# Allegro board GAMEBOARD5a.brd
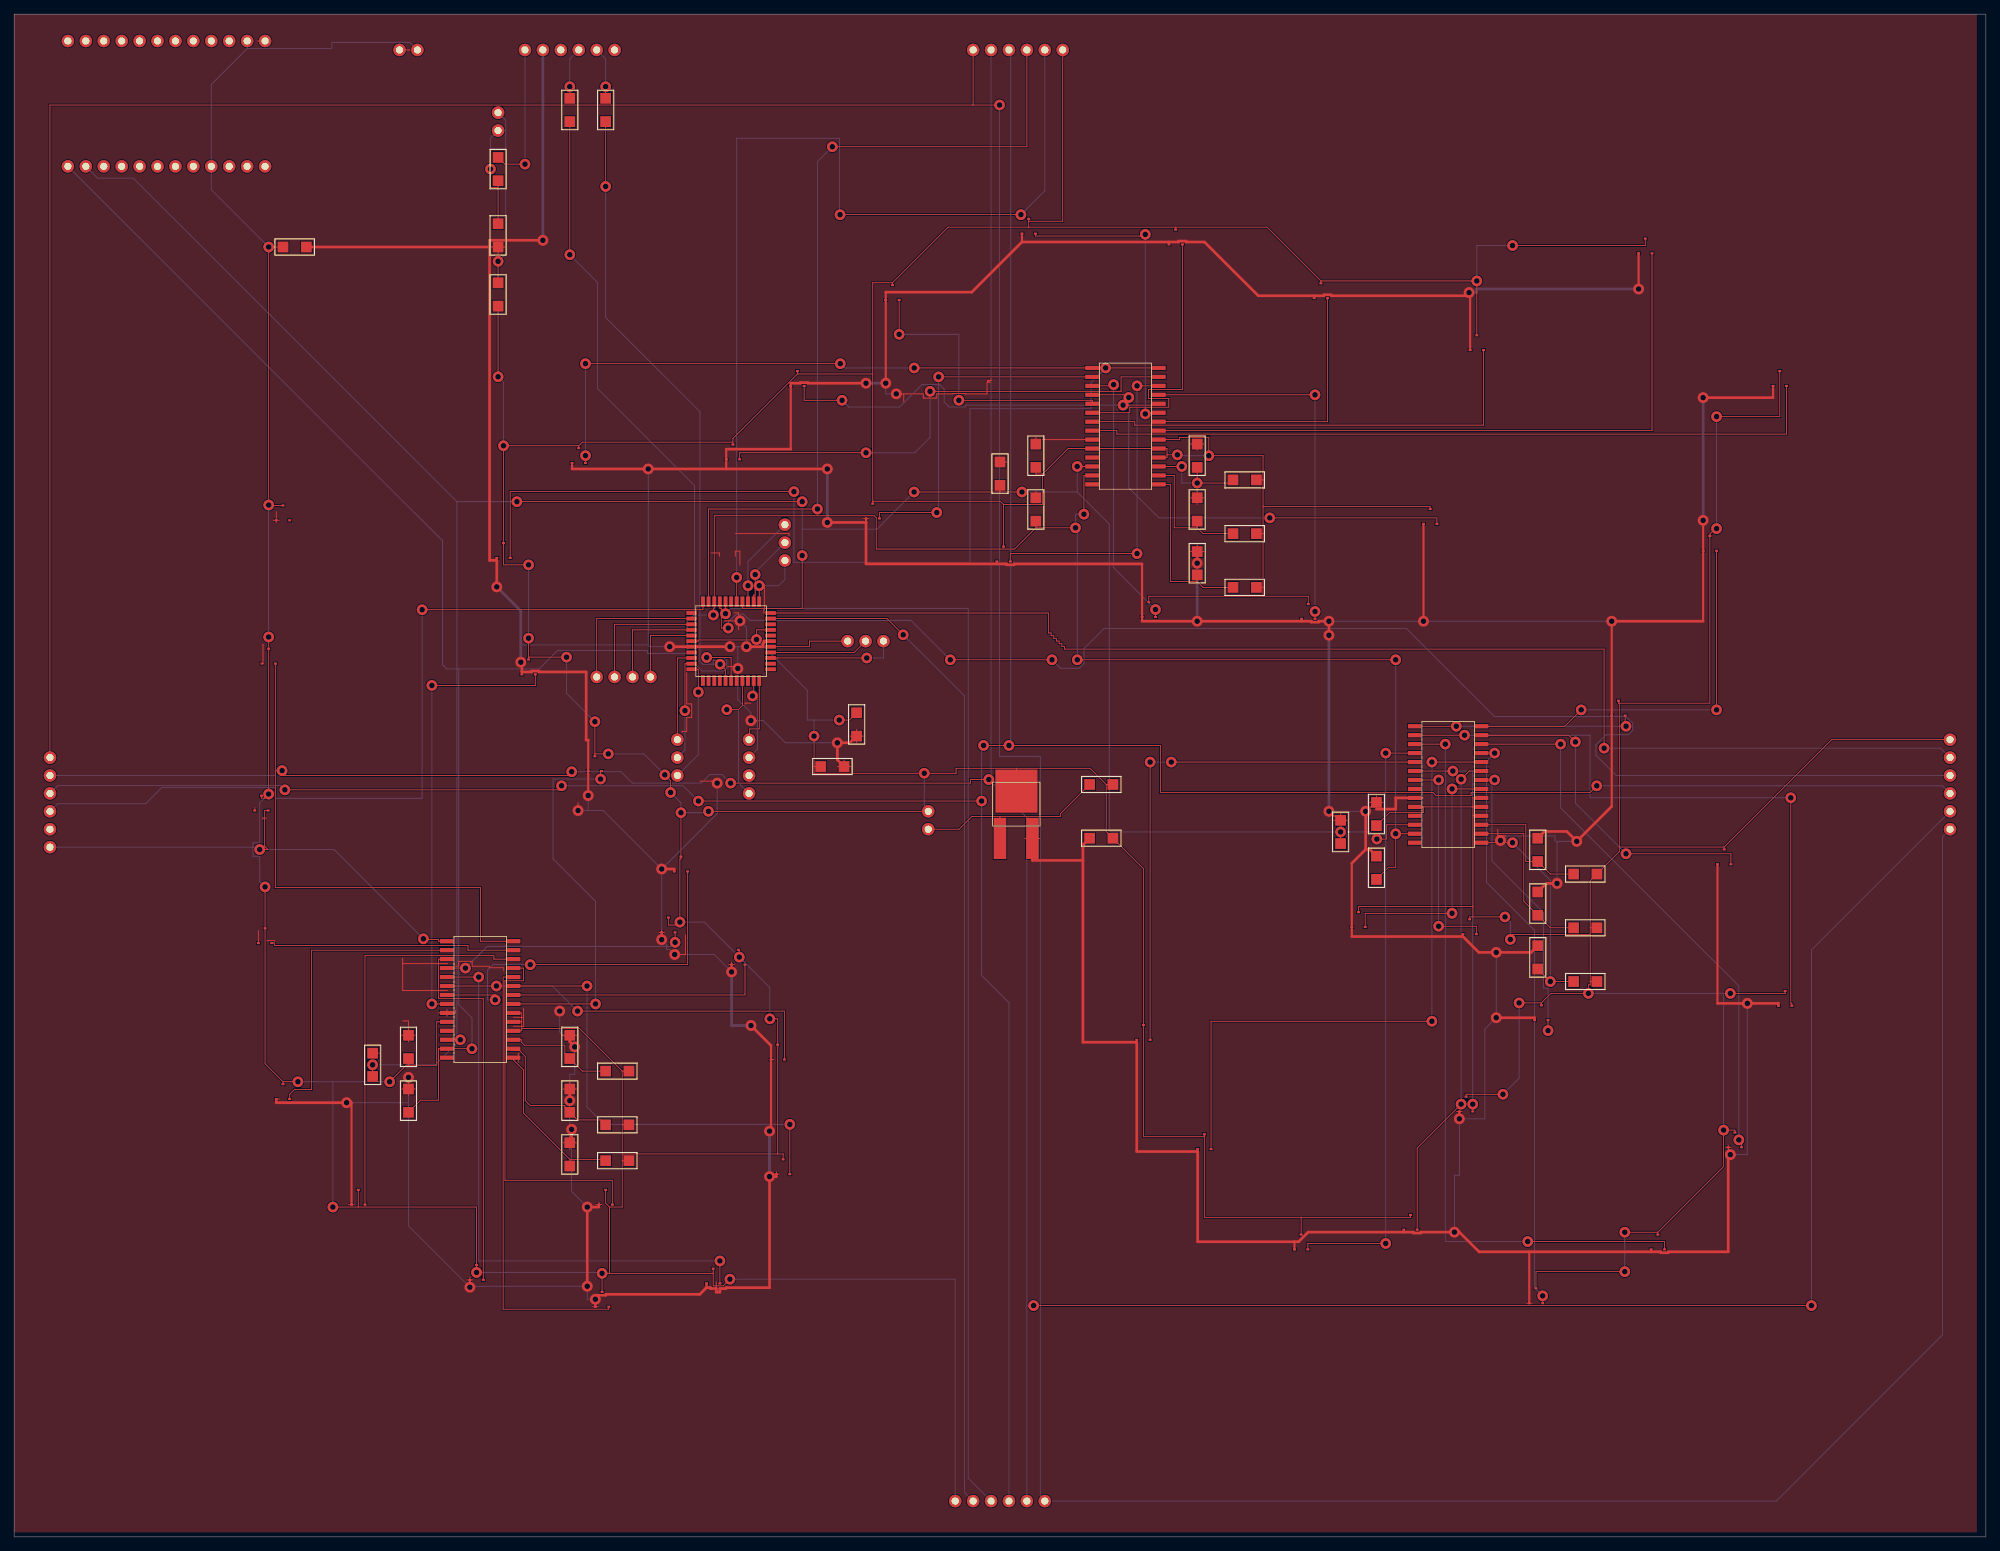
[diagram p0: board, top side]
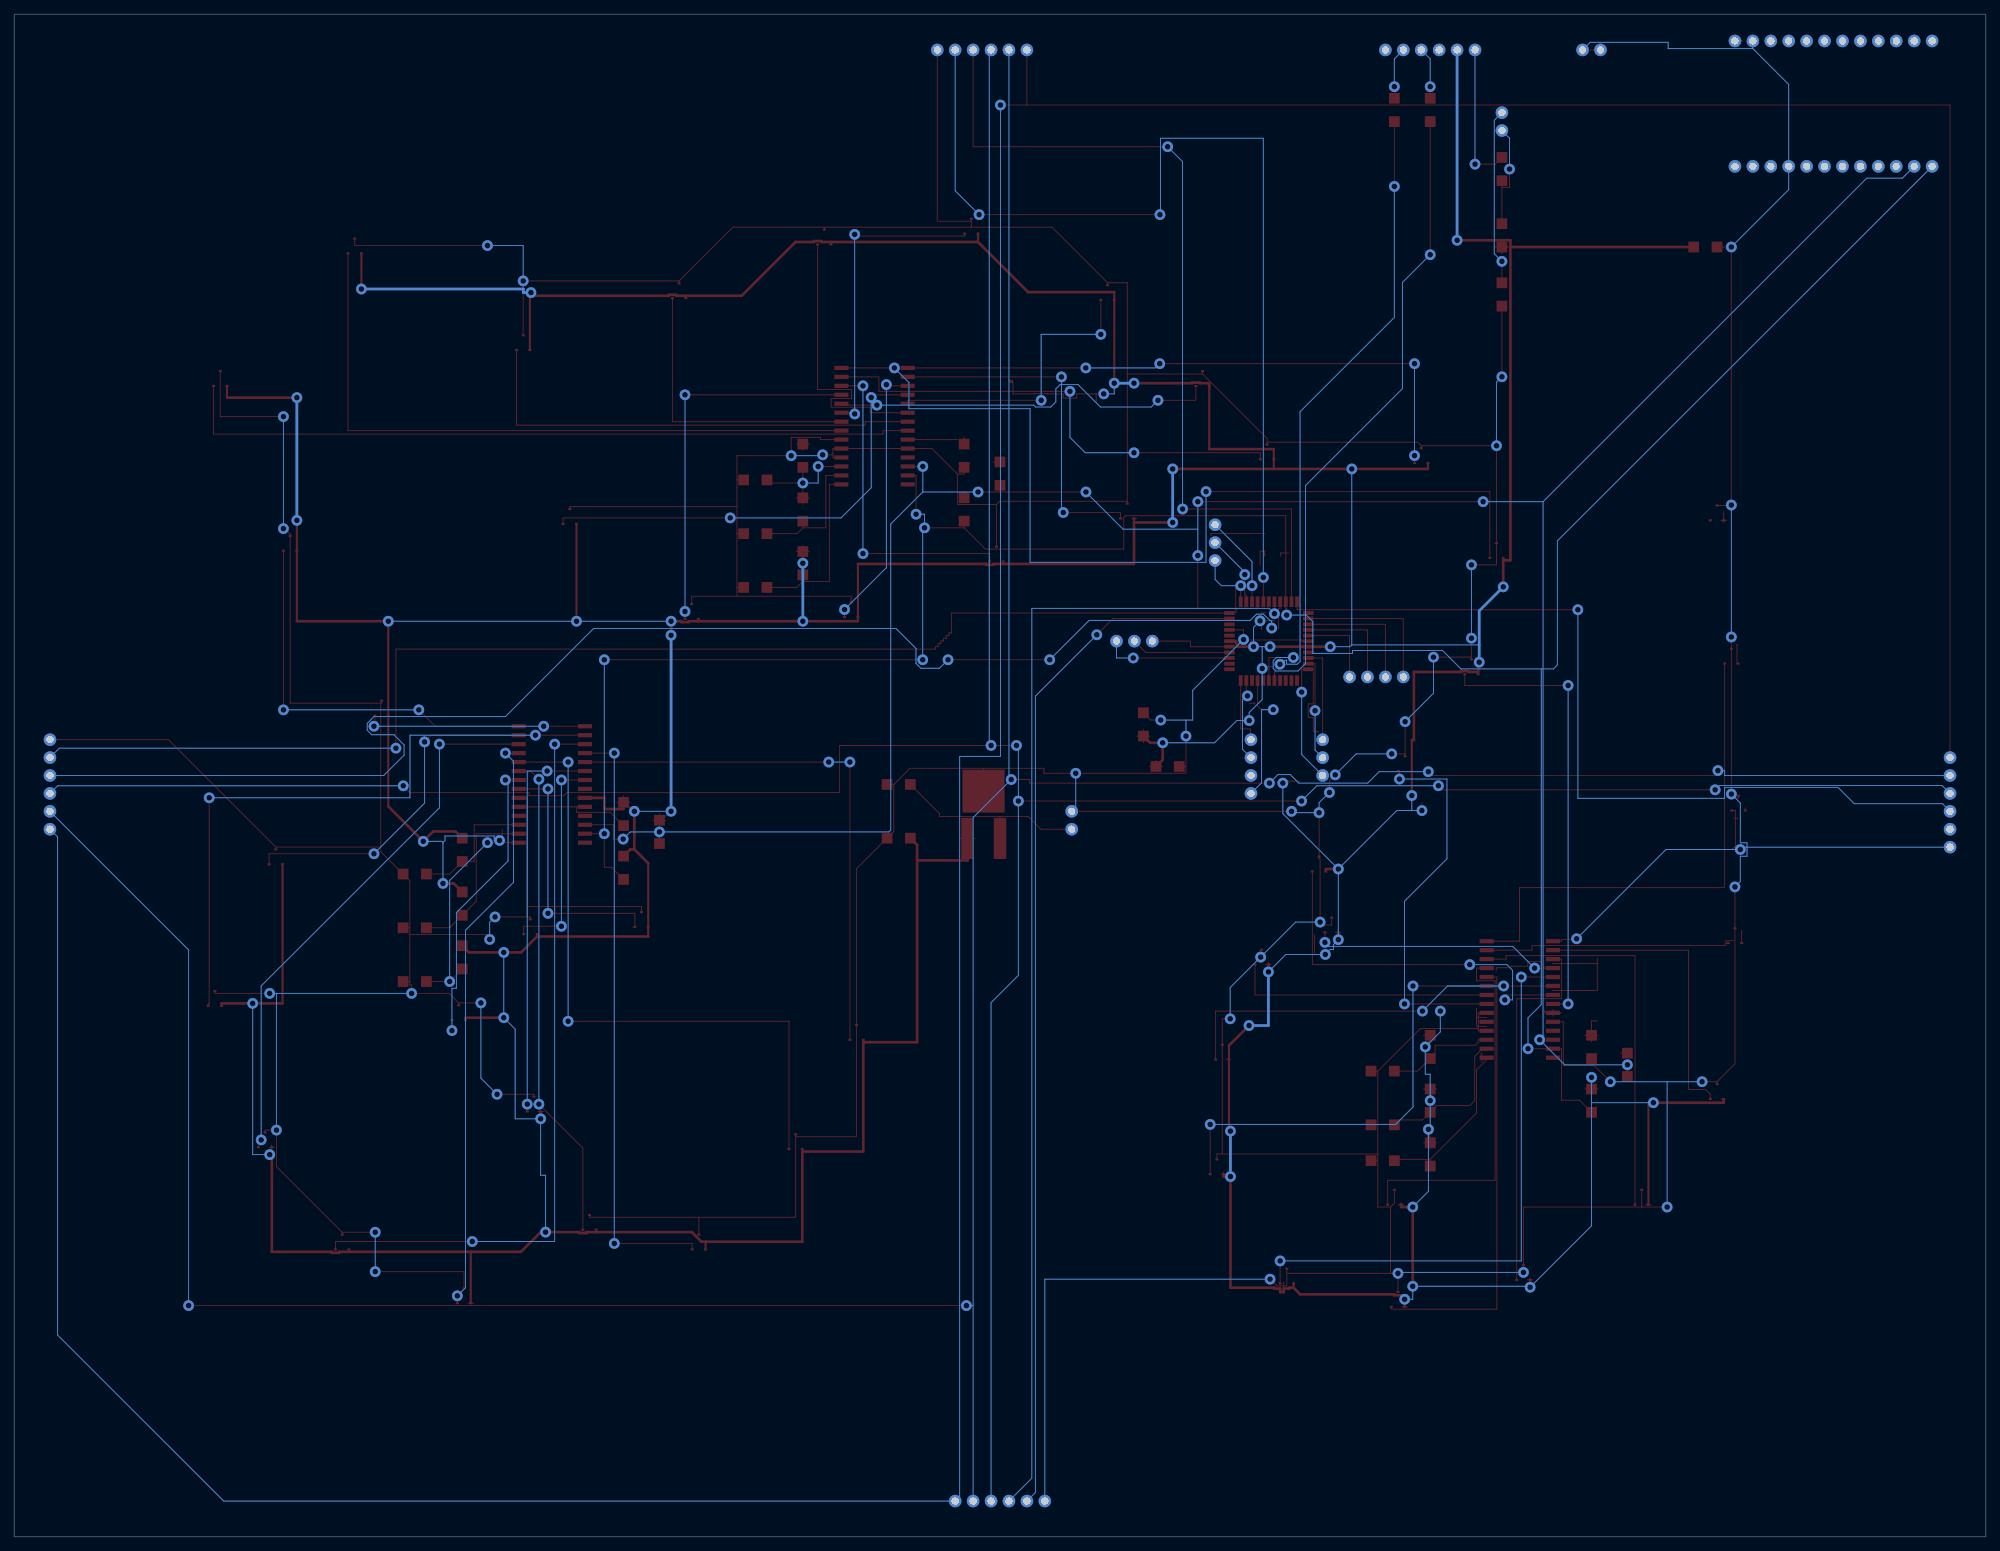
[diagram p1: board, bottom side, seen from below]

Outline 279.4 x 215.9 mm; copper layers: TOP, BOTTOM. Coordinates in mm from the lower left corner of the outline.
Outline path: 0,215.9 0,0 279.4,0 279.4,215.9 0,215.9

## Placement (name value [footprint] x y rotation side)
BT1  7.2V  [HEADER1X2]  129.54 101.6 180 top
C1  0.1 uF, 15V  [SMC1206]  114.3 109.22 0 top
C2  0.1 uF, 15V  [SMC1206]  119.38 116.84 270 top
C3  0.1uF  [SMC1206]  38.1 182.88 0 top
C4  0.1 uF, 15V  [SMC1206]  193.04 104.14 270 top
C5  0.1 uF, 15V  [SMC1206]  144.78 154.94 270 top
C6  0.1 uF, 15V  [SMC1206]  55.88 71.12 270 top
C7  0.1uF, 15V  [SMC1206]  152.4 106.68 0 top
C8  0.1uF, 15V  [SMC1206]  152.4 99.06 0 top
C9  0.1 uF, 15V  [SMC1206]  68.58 177.8 270 top
J1  CON3  [HEADER1X3]  109.22 142.24 0 top
J2  CON4  [HEADER1X4]  88.9 121.92 270 top
J3  CON3  [HEADER1X3]  119.38 127 90 top
J4  CON3  [HEADER1X3]  93.98 109.22 180 top
J5  CON4  [HEADER1X4]  104.14 111.76 0 top
J6  CON6  [HEADER1X6]  73.66 210.82 90 top
J7  JUMPER  [HEADER1X2]  68.58 200.66 0 top
J8  CON2  [HEADER1X2]  55.88 210.82 90 top
J9  Board Connector  [HEADER1X6]  5.08 109.22 0 top
J10  Board Connector  [HEADER1X6]  137.16 210.82 90 top
J11  Board Connector  [HEADER1X6]  274.32 101.6 180 top
J12  Board Connector  [HEADER1X6]  144.78 5.08 270 top
R1  22 ohm, 1/4W  [SMR1206]  83.82 200.66 90 top
R2  22 ohm, 1/4W  [SMR1206]  78.74 200.66 90 top
R3  10 kohm, 1/4W  [SMR1206]  68.58 182.88 90 top
R4  1 kohm, 1/4W  [SMR1206]  187.96 101.6 270 top
R5  1 kohm, 1/4W  [SMR1206]  139.7 152.4 270 top
R6  1 kohm, 1/4W  [SMR1206]  50.8 68.58 270 top
R7  220 ohm, 1/4W  [SMR1206]  68.58 195.58 270 top
R8  1 kohm, 1/4W  [SMR1206]  193.04 96.52 270 top
R9  1 kohm, 1/4W  [SMR1206]  144.78 147.32 270 top
R10  1 kohm, 1/4W  [SMR1206]  55.88 63.5 270 top
R11  1 kohm, 1/4W  [SMR1206]  215.9 99.06 270 top
R12  1 kohm, 1/4W  [SMR1206]  167.64 154.94 270 top
R13  1 kohm, 1/4W  [SMR1206]  78.74 71.12 270 top
R14  0 ohm, 1/4W  [SMR1206]  220.98 93.98 0 top
R15  0 ohm, 1/4W  [SMR1206]  172.72 149.86 0 top
R16  0 ohm, 1/4W  [SMR1206]  83.82 66.04 0 top
R17  1 kohm, 1/4W  [SMR1206]  215.9 91.44 270 top
R18  1 kohm, 1/4W  [SMR1206]  167.64 147.32 270 top
R19  1 kohm, 1/4W  [SMR1206]  78.74 63.5 270 top
R20  0 ohm, 1/4W  [SMR1206]  220.98 86.36 0 top
R21  0 ohm, 1/4W  [SMR1206]  172.72 142.24 0 top
R22  100 kohm, 1/4W  [SMR1206]  83.82 58.42 0 top
R23  1 kohm, 1/4W  [SMR1206]  215.9 83.82 270 top
R24  1 kohm, 1/4W  [SMR1206]  167.64 139.7 270 top
R25  1 kohm, 1/4W  [SMR1206]  78.74 55.88 270 top
R26  0 ohm, 1/4W  [SMR1206]  220.98 78.74 0 top
R27  100 kohm, 1/4W  [SMR1206]  172.72 134.62 0 top
R28  0 ohm, 1/4W  [SMR1206]  83.82 53.34 0 top
U1  -  [TCS40DPR]  38.1 145.03 0 top
U2  -  [TCS40DPR]  190.5 87.38 0 top
U3  -  [TCS40DPR]  250.19 164.08 0 top
U4  -  [TCS40DPR]  231.14 182.88 0 top
U5  -  [TCS40DPR]  72.9 123.19 0 top
U6  -  [TCS40DPR]  82.3 109.47 0 top
U7  -  [TCS40DPR]  206.25 86.36 0 top
U8  -  [TCS40DPR]  216.41 74.17 0 top
U9  -  [TCS40DPR]  207.26 169.16 0 top
U10  -  [TCS40DPR]  185.17 176.53 0 top
U11  -  [TCS40DPR]  94.49 95.25 0 top
U12  -  [TCS40DPR]  102.62 82.04 0 top
U13  PIC18F47K40-I/PT  [TQFPPIC18F47K40]  101.6 127 0 top
U14  -  [TCS40DPR]  205.74 61.21 0 top
U15  -  [TCS40DPR]  197.87 44.45 0 top
U16  -  [TCS40DPR]  164.59 184.15 0 top
U17  -  [TCS40DPR]  143.76 185.67 0 top
U18  -  [TCS40DPR]  108.2 68.58 0 top
U19  -  [TCS40DPR]  108.97 52.32 0 top
U20  -  [TCS40DPR]  160.02 71.37 0 top
U21  -  [TCS40DPR]  168.66 55.88 0 top
U22  -  [TCS40DPR]  124.46 176.28 0 top
U23  -  [TCS40DPR]  111 164.08 0 top
U24  -  [TCS40DPR]  99.06 36.83 0 top
U25  -  [TCS40DPR]  83.31 33.53 0 top
U26  -  [TCS40DPR]  182.37 41.66 0 top
U27  -  [TCS40DPR]  215.65 34.04 0 top
U28  -  [TCS40DPR]  200.66 144.53 0 top
U29  -  [TCS40DPR]  183.39 131.06 0 top
U30  -  [TCS40DPR]  92.71 86.61 0 top
U31  -  [TCS40DPR]  83.82 48.01 0 top
U32  -  [TCS40DPR]  232.92 41.66 0 top
U33  -  [TCS40DPR]  243.84 56.13 0 top
U34  -  [TCS40DPR]  160.78 131.32 0 top
U35  -  [TCS40DPR]  140.21 139.19 0 top
U36  -  [TCS40DPR]  65.53 37.34 0 top
U37  -  [TCS40DPR]  48.77 48.01 0 top
U38  -  [TCS40DPR]  250.95 76.2 0 top
U39  -  [TCS40DPR]  242.32 96.27 0 top
U40  -  [TCS40DPR]  121.67 145.29 0 top
U41  -  [TCS40DPR]  101.85 153.67 0 top
U42  -  [TCS40DPR]  38.1 62.99 0 top
U43  -  [TCS40DPR]  35.56 85.09 0 top
U45  -  [TCS40DPR]  227.33 117.35 0 top
U46  -  [TCS40DPR]  240.28 140.72 0 top
U47  -  [TCS40DPR]  80.01 153.16 0 top
U48  -  [TCS40DPR]  69.34 139.7 0 top
U49  -  [TCS40DPR]  35.05 103.89 0 top
U50  -  [TCS40DPR]  36.07 124.71 0 top
U51  MCP23017T  [MCP23017]  203.2 106.68 0 top
U52  MCP23017T  [MCP23017]  157.48 157.48 0 top
U53  MCP23017T  [MCP23017]  66.04 76.2 0 top
U54  MIC29310-5.0WU  [TO252AA]  139.7 99.06 0 top
U57  Photon  [PHOTONFOOTPRINT]  15.24 203.2 90 top

## Library data of the parts
BT1 = BATTERY
C1-C9 = CAP NP
J1 J3 J4 = CON3
J2 J5 = CON4
J6 = CON6
J7 = JUMPER
J8 = CON2
J9-J12 = Board Connector
R1-R28 = R
U1-U12 U14-U43 U45-U50 = TCS40DPR
U13 = PIC18F47K40-I/PT_0
U51-U53 = MCP23017T
U54 = MIC29310-5.0WU
U57 = Photon

## Footprints (pads in the part's own frame, mm; a bottom-side part is the same pattern mirrored in y, then rotated)
HEADER1X2
  round 1.778 hole 1.016: 1(0,1.27) 2(0,-1.27)
HEADER1X3
  round 1.778 hole 1.016: 1(0,1.27) 2(0,-1.27) 3(0,-3.81)
HEADER1X4
  round 1.778 hole 1.016: 1(0,1.27) 2(0,-1.27) 3(0,-3.81) 4(0,-6.35)
HEADER1X6
  round 1.778 hole 1.016: 1(0,1.27) 2(0,-1.27) 3(0,-3.81) 4(0,-6.35) 5(0,-8.89) 6(0,-11.43)
MCP23017
  rect 2x0.6 smd: 1(-4.699,8.255) 2(-4.699,6.985) 3(-4.699,5.715) 4(-4.699,4.445) 5(-4.699,3.175) 6(-4.699,1.905) 7(-4.699,0.635) 8(-4.699,-0.635) 9(-4.699,-1.905) 10(-4.699,-3.175) 11(-4.699,-4.445) 12(-4.699,-5.715) 13(-4.699,-6.985) 14(-4.699,-8.255) 15(4.699,-8.255) 16(4.699,-6.985) 17(4.699,-5.715) 18(4.699,-4.445) 19(4.699,-3.175) 20(4.699,-1.905) 21(4.699,-0.635) 22(4.699,0.635) 23(4.699,1.905) 24(4.699,3.175) 25(4.699,4.445) 26(4.699,5.715) 27(4.699,6.985) 28(4.699,8.255)
PHOTONFOOTPRINT
  round 1.778 hole 1.016: 1(8.89,7.62) 2(8.89,5.08) 3(8.89,2.54) 4(8.89,0) 5(8.89,-2.54) 6(8.89,-5.08) 7(8.89,-7.62) 8(8.89,-10.16) 9(8.89,-12.7) 10(8.89,-15.24) 11(8.89,-17.78) 12(8.89,-20.32) 13(-8.89,7.62) 14(-8.89,5.08) 15(-8.89,2.54) 16(-8.89,0) 17(-8.89,-2.54) 18(-8.89,-5.08) 19(-8.89,-7.62) 20(-8.89,-10.16) 21(-8.89,-12.7) 22(-8.89,-15.24) 23(-8.89,-17.78) 24(-8.89,-20.32)
SMC1206
  rect 1.524x1.524 smd: 1(0,0) 2(3.302,0)
SMR1206
  rect 1.524x1.524 smd: 1(0,0) 2(3.302,0)
TCS40DPR
  rect 0.42x0.3 smd: 1(-0.95,-0.9) 2(0.95,-0.9) 3(0,1.2)
TO252AA
  rect 1.778x5.842 smd: 1(-0.004,-0.034) 3(4.596,-0.034)
  rect 5.969x6.096 smd: 2(2.332,6.673)
TQFPPIC18F47K40
  rect 1.5x0.55 smd: 1(-5.588,3.988) 2(-5.588,3.2) 3(-5.588,2.388) 4(-5.588,1.6) 5(-5.588,0.787) 6(-5.588,0) 7(-5.588,-0.787) 8(-5.588,-1.6) 9(-5.588,-2.388) 10(-5.588,-3.2) 11(-5.588,-3.988) 23(5.588,-3.988) 24(5.588,-3.2) 25(5.588,-2.388) 26(5.588,-1.6) 27(5.588,-0.787) 28(5.588,0) 29(5.588,0.787) 30(5.588,1.6) 31(5.588,2.388) 32(5.588,3.2) 33(5.588,3.988)
  rect 0.55x1.5 smd: 12(-3.988,-5.588) 13(-3.2,-5.588) 14(-2.388,-5.588) 15(-1.6,-5.588) 16(-0.787,-5.588) 17(0,-5.588) 18(0.787,-5.588) 19(1.6,-5.588) 20(2.388,-5.588) 21(3.2,-5.588) 22(3.988,-5.588) 34(3.988,5.588) 35(3.2,5.588) 36(2.388,5.588) 37(1.6,5.588) 38(0.787,5.588) 39(0,5.588) 40(-0.787,5.588) 41(-1.6,5.588) 42(-2.388,5.588) 43(-3.2,5.588) 44(-3.988,5.588)

## Nets
GND: BT1.2(-) C1.1 C2.1 C3.1 C4.2 C5.2 C6.2 C7.2 C8.2 C9.2 J6.3 J8.2 J9.6(GND) J10.6(GND) J11.6(GND) J12.6(GND) R14.2 R15.2 R16.2 R20.2 R21.2 R22.2 R26.2 R27.2 R28.2 U1.3(GND) U2.3(GND) U3.3(GND) U4.3(GND) U5.3(GND) U6.3(GND) U7.3(GND) U8.3(GND) U9.3(GND) U10.3(GND) U11.3(GND) U12.3(GND) U13.6(VSS_0) U13.30(VSS_1) U14.3(GND) U15.3(GND) U16.3(GND) U17.3(GND) U18.3(GND) U19.3(GND) U20.3(GND) U21.3(GND) U22.3(GND) U23.3(GND) U24.3(GND) U25.3(GND) U26.3(GND) U27.3(GND) U28.3(GND) U29.3(GND) U30.3(GND) U31.3(GND) U32.3(GND) U33.3(GND) U34.3(GND) U35.3(GND) U36.3(GND) U37.3(GND) U38.3(GND) U39.3(GND) U40.3(GND) U41.3(GND) U42.3(GND) U43.3(GND) U45.3(GND) U46.3(GND) U47.3(GND) U48.3(GND) U49.3(GND) U50.3(GND) U51.10(VSS) U51.18(RESET) U51.19(INTB) U51.20(INTA) U52.10(VSS) U52.18(RESET) U52.19(INTB) U52.20(INTA) U53.10(VSS) U53.18(RESET) U53.19(INTB) U53.20(INTA) U54.2(GND) U57.11 U57.21
5 V: C1.2 C2.2 C3.2 C4.1 C5.1 C6.1 C8.1 J6.2 J8.1 R3.1 R4.1 R5.1 R6.1 R8.1 R9.1 R10.1 R11.1 R12.1 R13.1 R17.1 R18.1 R19.1 R23.1 R24.1 R25.1 U1.1(VCC) U2.1(VCC) U3.1(VCC) U4.1(VCC) U5.1(VCC) U6.1(VCC) U7.1(VCC) U8.1(VCC) U9.1(VCC) U10.1(VCC) U11.1(VCC) U12.1(VCC) U13.7(VDD_0) U13.28(VDD_1) U14.1(VCC) U15.1(VCC) U16.1(VCC) U17.1(VCC) U18.1(VCC) U19.1(VCC) U20.1(VCC) U21.1(VCC) U22.1(VCC) U23.1(VCC) U24.1(VCC) U25.1(VCC) U26.1(VCC) U27.1(VCC) U28.1(VCC) U29.1(VCC) U30.1(VCC) U31.1(VCC) U32.1(VCC) U33.1(VCC) U34.1(VCC) U35.1(VCC) U36.1(VCC) U37.1(VCC) U38.1(VCC) U39.1(VCC) U40.1(VCC) U41.1(VCC) U42.1(VCC) U43.1(VCC) U45.1(VCC) U46.1(VCC) U47.1(VCC) U48.1(VCC) U49.1(VCC) U50.1(VCC) U51.9(VDD) U52.9(VDD) U53.9(VDD) U54.3(OUT) U57.12
CD1: J9.5(CD) U13.39(RD0)
CD2: J10.5(CD) U13.38(RD1)
CD3: J11.5(CD) U13.33(RA6)
CD4: J12.5(CD) U13.32(RA7)
ICSPCLK: R1.1 U13.16(ICSPCLK/RB6)
ICSPDAT: R2.1 U13.17(ICSPDAT/RB7)
MCLR/VPP: J6.1 R7.1 U13.18(VPP/MCLR/RE3)
SCK: R4.2 R5.2 R6.2 U13.37(RC3) U51.12(SCK) U52.12(SCK) U53.12(SCK) U57.14
SCK1: J9.1(SCK) J10.1(SCK) J11.1(SCK) J12.1(SCK)
SDA: R8.2 R9.2 R10.2 U13.42(RC4) U51.13(SDA) U52.13(SDA) U53.13(SDA) U57.13
SDI1: J9.2(SDI) J10.2(SDI) J11.2(SDI) J12.2(SDI)
SDO1: J9.3(SDO) J10.3(SDO) J11.3(SDO) J12.3(SDO)
SS1: J9.4(SS) U13.44(RC6)
SS2: J10.4(SS) U13.43(RC5)
SS3: J11.4(SS) U13.41(RD3)
SS4: J12.4(SS) U13.40(RD2)
N40578: U6.2(VOUT) U53.21(GPA0)
N40604: U12.2(VOUT) U53.22(GPA1)
N40612: U19.2(VOUT) U53.23(GPA2)
N40620: U25.2(VOUT) U53.24(GPA3)
N40628: U31.2(VOUT) U53.25(GPA4)
N40636: U37.2(VOUT) U53.26(GPA5)
N40644: U43.2(VOUT) U53.27(GPA6)
N40652: U50.2(VOUT) U53.28(GPA7)
N41000: R19.2 R22.1 U53.16(A1)
N41020: R25.2 R28.1 U53.15(A0)
N41032: R13.2 R16.1 U53.17(A2)
N41290: U1.2(VOUT) U51.8(GPB7)
N41302: U7.2(VOUT) U51.7(GPB6)
N41314: U14.2(VOUT) U51.6(GPB5)
N41326: U20.2(VOUT) U51.5(GPB4)
N41338: U26.2(VOUT) U51.4(GPB3)
N41350: U32.2(VOUT) U51.3(GPB2)
N41362: U38.2(VOUT) U51.2(GPB1)
N41374: U45.2(VOUT) U51.1(GPB0)
N41442: U2.2(VOUT) U51.21(GPA0)
N41446: U8.2(VOUT) U51.22(GPA1)
N41450: U15.2(VOUT) U51.23(GPA2)
N41454: U21.2(VOUT) U51.24(GPA3)
N41458: U27.2(VOUT) U51.25(GPA4)
N41462: U33.2(VOUT) U51.26(GPA5)
N41466: U39.2(VOUT) U51.27(GPA6)
N41734: U46.2(VOUT) U51.28(GPA7)
N42242: R17.2 R20.1 U51.16(A1)
N42246: R23.2 R26.1 U51.15(A0)
N42268: R11.2 R14.1 U51.17(A2)
N42276: R24.2 R27.1 U52.15(A0)
N42308: R18.2 R21.1 U52.16(A1)
N42508: J7.2 R3.2 R7.2
N42712: U3.2(VOUT) U52.8(GPB7)
N42740: U9.2(VOUT) U52.7(GPB6)
N42752: U16.2(VOUT) U52.6(GPB5)
N42772: U22.2(VOUT) U52.5(GPB4)
N42784: U28.2(VOUT) U52.4(GPB3)
N42796: U34.2(VOUT) U52.3(GPB2)
N42808: U40.2(VOUT) U52.2(GPB1)
N42820: U47.2(VOUT) U52.1(GPB0)
N42884: U4.2(VOUT) U52.21(GPA0)
N42896: U10.2(VOUT) U52.22(GPA1)
N42900: U17.2(VOUT) U52.23(GPA2)
N42904: U23.2(VOUT) U52.24(GPA3)
N42908: U29.2(VOUT) U52.25(GPA4)
N42912: U35.2(VOUT) U52.26(GPA5)
N42916: U41.2(VOUT) U52.27(GPA6)
N43192: U48.2(VOUT) U52.28(GPA7)
N43224: C9.1 J7.1
N43624: R12.2 R15.1 U52.17(A2)
N43852: U5.2(VOUT) U53.8(GPB7)
N43864: U11.2(VOUT) U53.7(GPB6)
N43876: U18.2(VOUT) U53.6(GPB5)
N43888: U24.2(VOUT) U53.5(GPB4)
N43900: U30.2(VOUT) U53.4(GPB3)
N43912: U36.2(VOUT) U53.3(GPB2)
N43924: U42.2(VOUT) U53.2(GPB1)
N43936: U49.2(VOUT) U53.1(GPB0)
N104053: BT1.1(+) C7.1 U54.1(IN)
N111887: J6.4 R2.2
N111889: J6.5 R1.2
N118143: J3.1 U13.27(RE2)
N118150: J3.2 U13.26(RE1)
N118163: J3.3 U13.25(RE0)
N118167: J5.1 U13.22(RA3)
N118185: J5.4 U13.19(RA0)
N118192: J2.4 U13.2(RD4)
N118196: J2.3 U13.3(RD5)
N118203: J2.2 U13.4(RD6)
N118215: J2.1 U13.5(RD7)
N118227: J4.3 U13.9(RB0)
N118234: J4.2 U13.10(RB1)
N118238: J4.1 U13.11(RB2)
N118679: J1.1 U13.36(RC2)
N118686: J1.2 U13.35(RC1)
N118690: J1.3 U13.34(RC0)
N128561: J5.2 U13.21(RA2)
N128579: J5.3 U13.20(RA1)

Pads without a net: J6 6; U13 1 8 12 13 14 15 23 24 29 31; U51 11 14; U52 11 14; U53 11 14; U57 1 2 3 4 5 6 7 8 9 10 15 16 17 18 19 20 22 23 24

## Via types
v1: diameter 1.524, hole 0.8, TOP to BOTTOM, 235 vias

## Routing (per net, layer and track width the routed paths; a pad name or vN(x,y) marks a point on that pad's centre or on a via; arc(x,y) is an arc through that point)
GND: length 1645.8
  TOP w0.127: U53.20 71.93,74.3 71.93,73.03 ; v1(107.08,73.45) 108.2,73.45 U18.3 108.2,54.29 ; 199.69,103.5 199.69,102.73 194.93,102.73 C4.2 ; 199.69,103.5 198.5,103.5 ; 199.69,103.5 206.71,103.5 ; U52.20 165.15,155.57 165.15,155.89 169.29,155.89 v1(169.29,153.29) 176.97,153.29 176.97,149.86 ; 86.17,53.34 86.17,46.77 84.37,46.77 ; 86.17,53.34 R28.2 ; 86.17,53.34 86.17,54.29 ; 99.06,37.37 84.37,37.37 ; 99.06,37.37 U24.3 ; 99.06,37.37 99.06,35.59 100.48,35.59 v1(101.43,36.54) ; 84.37,37.37 84.37,46.77 ; 84.37,37.37 v1(83.31,37.37) U25.3 ; U6.3 82.3,111.01 ; 82.3,111.01 v1(84.2,111.01) ; 82.3,111.01 v1(82.3,115.58) ; 84.37,46.77 83.82,47.31 U31.3 ; 71.93,73.03 71.93,72.07 ; 71.93,73.03 U53.19 ; 71.93,72.07 71.93,71.75 U53.18 ; 71.93,72.07 80.14,72.07 86.17,66.04 ; 168.66,56.74 168.66,45.31 182.37,45.31 ; 168.66,56.74 U21.3 ; 168.66,56.74 160.02,56.74 U20.3 160.02,94.74 C8.2 154.75,100.01 154.75,106.68 ; v1(102.76,82.2) 102.76,83.24 U12.3 ; 227.46,97.81 227.46,97.16 R14.2 223.33,93.03 223.33,86.36 ; 227.46,97.81 242.32,97.81 ; 227.46,97.81 227.46,118.21 ; U28.3 200.66,146.07 176.97,146.07 ; 163.37,153.42 v1(164.83,153.42) ; 163.37,153.42 163.37,154.31 U52.19 U52.10 149.35,154.31 145.73,150.69 ; 163.37,153.42 163.37,153.03 U52.18 ; U16.3 164.59,185.69 ; 164.59,185.69 177.55,185.69 185.17,178.07 ; 164.59,185.69 143.76,185.69 ; 121.67,146.83 139.75,146.83 140.21,146.37 ; 121.67,146.83 U40.3 ; 121.67,146.83 121.67,164.88 ; R21.2 176.97,142.24 ; 176.97,142.24 176.97,134.62 ; 176.97,142.24 176.97,146.07 ; 176.97,133.37 160.78,133.37 U34.3 ; 176.97,133.37 183.39,133.37 U29.3 ; 176.97,133.37 176.97,134.62 ; 113.35,109.22 113.35,108.27 v1(128.97,108.27) 133.48,108.27 133.48,108.97 142.03,108.97 ; 113.35,109.22 v1(113.35,113.54) ; 113.35,109.22 C1.1 ; 154.75,106.68 152.46,108.97 142.03,108.97 ; 154.75,106.68 C7.2 ; U47.3 80.01,154.7 ; 80.01,154.7 80.52,155.21 101.85,155.21 ; 80.01,154.7 v1(69.34,154.7) U48.3 69.34,137.82 v1(72.9,137.82) ; U1.3 36.13,146.23 v1(36.07,146.3) v1(36.07,182.88) C3.1 ; U51.18 206.71,102.23 ; 206.71,102.23 206.71,103.5 ; 206.71,102.23 206.71,89.36 ; 38.1,64.53 35.56,67.07 U43.3 v1(35.56,92.16) ; 38.1,64.53 U42.3 ; 38.1,64.53 v1(40.22,64.53) ; U19.3 108.97,54.29 108.2,54.29 ; 55.88,66.87 C6.2 ; 55.88,66.87 59.88,66.87 59.88,73.03 61.34,73.03 ; 55.88,66.87 55.55,66.87 v1(53.21,64.53) ; 142.03,108.97 U54.2 ; U2.3 190.5,89.36 206.71,89.36 ; v1(98.39,102.87) BT1.2 ; 223.33,86.36 223.33,85.41 ; 223.33,86.36 R20.2 ; R26.2 223.33,78.74 ; 223.33,78.74 223.33,78.27 223.08,78.27 v1(223.08,77.06) 217.76,77.06 216.41,75.71 ; 223.33,78.74 223.33,85.41 ; 223.33,85.41 212.02,85.41 v1(212.02,84.71) ; 206.71,103.5 207.9,103.5 ; 206.71,103.5 206.71,104.78 U51.20 ; 121.67,164.88 121.67,177.82 124.46,177.82 ; 121.67,164.88 111,164.88 ; U38.3 250.95,77.06 v1(243.19,77.06) ; 227.46,118.21 227.33,118.21 U45.3 ; 227.46,118.21 240.28,118.21 U46.3 240.28,142.19 241.05,142.96 v1(241.24,142.96) ; 143.76,186.53 148.59,186.53 J10.6 ; 143.76,186.53 U17.3 ; 143.76,186.53 143.76,185.69 ; U39.3 242.32,97.81 ; 242.32,97.81 257.54,113.03 J11.6 ; v1(241.24,158.83) 250.19,158.83 U3.3 ; 176.97,146.07 176.97,149.86 ; 232.92,43.2 v1(228.23,43.2) ; 232.92,43.2 U32.3 ; 232.92,43.2 242.23,52.51 v1(242.23,57.67) 243.84,57.67 U33.3 ; U30.3 92.71,86.75 94.34,86.75 v1(94.34,87.16) 94.34,96.11 94.49,96.11 U11.3 v1(94.49,102.68) ; v1(210.97,62.75) 205.74,62.75 U14.3 ; 111,164.88 101.85,155.74 101.85,155.21 ; 111,164.88 U23.3 ; R15.2 176.97,149.86 ; 140.21,146.37 145.73,146.37 145.73,150.69 ; 140.21,146.37 U35.3 ; 86.17,58.42 86.17,54.29 ; 86.17,58.42 86.17,66.04 ; 86.17,58.42 R22.2 ; 86.17,54.29 108.2,54.29 ; 182.37,45.31 U26.3 ; 182.37,45.31 197.87,45.31 U15.3 ; U22.3 124.46,177.82 ; 124.46,177.82 132.33,185.69 143.76,185.69 ; 185.17,178.07 v1(207.26,178.07) U9.3 ; 185.17,178.07 U10.3 ; 101.85,155.21 U41.3 ; U27.3 215.65,37.61 v1(228.23,37.61) ; R16.2 86.17,66.04 ; U49.3 35.05,104.75 35.5,104.75 36.07,105.31 v1(36.07,105.32) 36.07,105.32 U50.3 v1(36.07,127.59) ; C5.2 144.78,150.69 145.73,150.69 ; C9.2 v1(68.58,164.48) ; v1(72.9,127.42) 72.9,124.73 ; 72.9,124.73 U5.3 ; 72.9,124.73 v1(78.28,124.73) ; U37.3 48.77,46.77 ; 48.77,46.77 65.53,46.77 U36.3 65.52,38.54 v1(65.52,37.5) ; 48.77,46.77 v1(45.17,46.77) ; 176.97,134.62 R27.2 ; 206.71,87.9 v1(211.25,87.9) ; 206.71,87.9 206.71,89.36 ; 206.71,87.9 206.25,87.9 U7.3 ; v1(116.92,115.81) 118.35,115.81 C2.1 ; v1(212.33,183.08) 231.14,183.08 U4.3 ; U13.30 105.19,128.6 v1(105.19,127.23) 105.13,127.17 96.95,127.17 96.95,127 U13.6 ; v1(93.02,105.54) 93.02,107.22 v1(92.2,108.04) ; 216.41,75.71 v1(213.26,75.71) ; 216.41,75.71 U8.3
  BOTTOM w0.127: v1(68.58,164.48) 69.34,163.72 v1(69.34,154.7) ; v1(83.31,37.37) 83.18,37.5 v1(65.52,37.5) ; J9.6 33.85,97.79 ; 33.85,97.79 33.85,98.41 34.8,98.41 34.8,104.05 v1(36.07,105.32) ; 33.85,97.79 33.85,96.5 34.8,96.5 34.8,92.92 v1(35.56,92.16) ; 33.85,97.79 34.8,97.79 ; 33.02,211.01 45.02,211.01 45.02,211.9 56.07,211.9 J8.2 ; 33.02,211.01 27.94,205.93 U57.21 27.94,191.01 v1(36.07,182.88) ; 33.02,211.01 U57.11 ; v1(72.9,127.42) v1(72.9,137.82) ; v1(212.02,84.71) 212.02,87.14 v1(211.25,87.9) ; v1(243.19,77.06) 242.23,77.06 ; 242.23,77.06 v1(223.08,77.06) ; 242.23,77.06 v1(242.23,57.67) ; 113.35,115.81 v1(113.35,113.54) ; 113.35,115.81 v1(116.92,115.81) ; 113.35,115.81 112.39,115.81 112.39,120.02 v1(105.19,127.23) ; v1(92.2,108.04) 89.23,111.01 v1(84.2,111.01) ; v1(101.43,36.54) 133.35,36.54 J12.6 ; v1(128.97,108.27) 128.97,103.44 BT1.2 ; v1(210.97,62.75) 213.26,65.04 v1(213.26,75.71) ; v1(93.02,105.54) 94.49,104.08 v1(94.49,102.68) 98.2,102.68 v1(98.39,102.87) ; v1(107.08,73.45) 107.08,77.88 v1(102.76,82.2) 97.8,87.16 v1(94.34,87.16) ; v1(207.26,178.07) 207.26,183.08 v1(212.33,183.08) ; 45.17,64.53 40.22,64.53 v1(40.22,64.53) ; 45.17,64.53 v1(45.17,46.77) ; 45.17,64.53 v1(53.21,64.53) ; v1(36.07,146.3) 36.07,146.29 v1(36.07,127.59) ; v1(78.28,124.73) 78.28,119.6 v1(82.3,115.58) ; v1(164.83,153.42) 164.96,153.29 v1(169.29,153.29) ; v1(241.24,158.83) v1(241.24,142.96) ; v1(228.23,37.61) v1(228.23,43.2)
5 V: length 1588
  TOP w0.127: 72.18,73.66 72.18,72.39 70.74,72.39 ; 72.18,73.66 70.74,73.66 ; 72.18,73.66 72.18,74.93 ; 102.01,131.02 102.66,131.02 102.66,129.87 ; 120.33,144.39 U40.1 121.1,144.39 ; 37.15,61.81 U42.1 37.54,62.09 ; 48.21,47.11 U37.1 47.43,47.11 ; 210.61,99.41 210.23,99.41 210.23,100.33 ; 210.61,99.41 v1(210.61,98.74) ; 210.61,99.41 211.38,99.41 ; 102.66,129.87 v1(102.85,129.87) ; 102.66,129.87 100.69,129.87 ; 102.66,129.87 102.66,128.6 ; 82.48,47.11 U31.1 ; U31.1 82.87,47.43 ; U31.1 83.26,47.11 ; R4.1 187.96,102.54 ; R4.1 187.02,101.6 ; R4.1 188.9,101.6 ; R4.1 187.37,102.19 187.07,102.19 186.38,102.88 v1(186.31,102.88) ; U1.1 37.15,145.35 ; U1.1 37.15,143.81 ; U1.1 37.54,144.13 ; U1.1 36.76,144.13 ; 192.1,104.14 C4.1 ; C4.1 193.04,103.19 ; C4.1 193.98,104.14 ; C4.1 193.04,105.08 ; C4.1 192.47,103.57 192.28,103.57 191.58,102.88 v1(191.52,102.88) ; v1(79.91,102.98) 79.91,103.74 79.91,103.74 79.91,104.14 ; v1(93.6,82.58) 95.15,82.58 95.15,85.37 ; 199.68,104.78 U51.9 ; 68.58,181.94 R3.1 ; R3.1 67.64,182.88 ; R3.1 68.58,183.83 ; R3.1 69.52,182.88 ; U36.1 64.58,36.77 ; U36.1 64.19,36.44 ; U36.1 64.97,36.44 ; 126.07,162.05 126.07,160.9 ; 126.07,162.05 v1(125,162.05) ; 126.07,162.05 128.84,162.05 128.84,161.46 130.74,161.46 130.74,162.05 132.92,162.05 132.92,162.1 134.82,162.1 134.82,162.05 137.86,162.05 137.86,163.62 137.92,163.69 ; 116.66,109.22 C1.2 ; C1.2 118.54,109.22 ; C1.2 117.6,110.16 ; J8.1 56.07,210.82 56.07,210.76 ; R24.1 167.64,140.64 ; R24.1 166.7,139.7 ; R24.1 168.58,139.7 ; 82.75,32.63 U25.1 81.97,32.63 ; U10.1 184.22,175.97 ; 101.12,123.38 102.55,123.38 v1(102.55,123.13) 101.92,123.13 101.92,123.21 ; 61.34,73.82 61.34,74.3 ; 61.34,74.3 61.34,74.77 ; 61.34,74.3 60.16,74.3 ; 61.34,74.3 62.53,74.3 62.53,74.66 ; 109.8,141.9 109.8,142.25 102.2,142.25 ; 107.64,67.68 U18.1 ; 104.39,115.83 104.39,116.14 103.9,116.14 103.9,115.83 104.39,115.83 ; 104.39,115.83 v1(104.39,115.74) 105.19,115.74 105.19,115.58 ; 145.36,99.03 U54.3 143.23,99.03 ; U15.1 196.92,43.21 ; 166.7,147.32 R18.1 ; R18.1 167.64,146.38 ; R18.1 168.58,147.32 ; R18.1 167.64,148.46 ; U20.1 159.07,70.13 ; 36.97,84.44 36.88,84.53 35.81,84.53 ; 69.39,80.26 69.39,80.7 67.34,80.7 67.34,80.91 64.91,80.91 64.91,81.6 63,81.6 63,80.91 62.53,80.91 ; R19.1 79.68,63.5 ; R19.1 77.8,63.5 ; R19.1 78.74,64.44 ; U7.1 205.3,85.12 ; 106.31,131.02 106.25,131.02 106.25,131.45 106.31,131.45 106.31,135.05 ; R9.1 144.78,148.26 ; 55.88,70.18 C6.1 ; C6.1 56.82,71.12 ; C6.1 54.94,71.12 ; C6.1 55.88,73.15 55.06,73.15 ; 214.31,33.14 U27.1 215.08,33.14 ; 101.28,81.14 U12.1 ; U12.1 102.05,81.14 ; U12.1 101.67,81.47 ; 104.39,118.21 103.59,118.21 103.59,118.04 ; 102.84,137.76 102.84,139.76 102.2,139.76 102.2,139.03 ; 138.43,164.19 138.43,163.94 137.92,163.94 137.92,163.69 ; U49.1 34.1,103.37 ; 95.31,122.55 95.31,118.1 96.01,118.1 96.01,116.19 95.31,116.19 95.31,114.21 94.65,114.21 94.65,114.02 ; 77.31,74.76 v1(77.31,74.55) ; 137.92,163.69 138.12,163.88 138.14,163.88 138.14,163.68 138.33,163.68 ; C2.2 119.38,114.48 ; C2.2 120.32,113.54 ; C2.2 119.38,112.6 ; C2.2 118.44,113.54 ; U32.1 231.97,40.42 ; C5.1 144.78,155.94 ; 79.68,71.12 R13.1 77.8,71.12 ; 35.24,101.79 35.24,101.91 35.75,101.91 ; U30.1 92.15,85.71 ; U30.1 91.76,86.04 ; U30.1 91.37,85.71 ; 204.4,60.31 U14.1 205.18,60.31 ; 97.21,107.15 98.86,107.15 99.14,106.87 v1(99.62,106.87) ; R5.1 140.64,152.4 ; 55.88,62.56 R10.1 ; R10.1 v1(55.88,65.15) 55.88,65.21 ; R10.1 56.82,63.5 ; R10.1 54.94,63.5 ; U16.1 163.64,183.59 ; 79.68,55.88 R25.1 ; R25.1 78.74,54.94 ; R25.1 78.74,56.82 ; R25.1 77.8,55.88 ; 55.06,81.28 55.06,82.04 ; 55.06,81.28 55.06,77.47 61.4,77.47 ; 55.06,81.28 61.4,81.28 ; 71.57,68.55 71.44,68.55 71.44,67.32 ; 107.63,51.42 U19.1 ; U19.1 108.4,51.42 ; U19.1 108.02,51.75 ; v1(243.19,54.19) 243.19,54.66 242.89,54.96 U33.1 ; R12.1 167.64,154.05 ; R12.1 168.58,154.94 ; R12.1 166.7,154.94 ; U43.1 34.61,85.95 ; U21.1 167.71,54.64 ; 99.95,139.03 99.95,139.5 98.81,139.5 ; U35.1 139.26,137.95 ; U50.1 35.26,123.81 35.26,126.53 35.19,126.53 ; U48.1 68.39,138.46 ; U33.1 242.89,55.56 ; U33.1 242.5,55.23 ; U33.1 243.28,55.23 ; R6.1 51.74,68.58 ; U29.1 182.44,129.82 ; U57.12 34.49,212.09 ; 99.5,36.14 99.5,35.21 ; U52.9 145.73,155.57 ; U5.1 71.95,122.63
  TOP w0.3: v1(123.51,163.57) U22.1 123.51,176.48 ; U8.1 215.46,73.61 ; 107.25,57.74 U18.1 107.25,69.66 ; U47.1 79.06,151.41 ; U19.1 108.02,51.08 ; U31.1 82.87,46.77 ; U17.1 142.81,183.59 ; 110.05,163.57 U23.1 110.05,154.22 ; 226.38,103.57 U45.1 v1(226.38,129.82) ; U28.1 v1(199.71,129.82) ; 100.9,154.22 U41.1 100.9,151.41 ; 159.83,137.95 U34.1 159.83,129.82 ; U24.1 98.11,35.34 ; 189.55,95.51 U2.1 189.55,85.12 ; 47.82,61.56 U37.1 ; U39.1 241.37,75.64 ; U14.1 v1(204.79,59.27) ; 250,75.64 U38.1 ; U30.1 v1(91.76,84.67) ; U12.1 v1(101.67,80.1) ; U3.1 249.24,161.52 ; v1(239.33,144.12) U46.1 239.33,129.82 ; U36.1 v1(64.58,35.4) ; U40.1 120.72,143.83 ; U11.1 93.54,94.69 ; U26.1 181.42,41.85 ; U4.1 v1(230.19,176.92) ; 81.35,112.98 U6.1 v1(81.35,105.1) ; U9.1 206.31,175.82 ; U25.1 v1(82.36,33.69) ; U27.1 214.7,40.42
  TOP w0.381: C3.2 67.38,182.88 ; 67.38,182.88 67.38,183.83 v1(74.93,183.83) ; 67.38,182.88 67.38,138.46 68.39,138.46 v1(68.39,134.69) ; 215.46,73.61 v1(210.02,73.61) ; C1.2 116.65,110.17 v1(116.65,112.59) 118.43,112.59 C2.2 ; R11.1 216.85,100.01 220.03,100.01 v1(221.43,98.61) 226.38,103.57 ; v1(71.8,124.02) 71.95,123.87 71.95,122.63 73.32,122.63 73.32,122.76 74.38,122.76 74.38,122.63 81.06,122.63 81.06,112.98 81.35,112.98 ; 206.31,175.82 206.17,175.97 ; 206.17,175.97 186.64,175.97 186.64,176.1 185.59,176.1 185.59,175.97 176.29,175.97 168.67,183.59 166.07,183.59 166.07,183.72 165.01,183.72 165.01,183.59 142.81,183.59 135.7,176.48 123.51,176.48 ; 206.17,175.97 v1(206.17,176.42) ; 110.05,163.57 111.42,163.57 111.42,163.65 112.48,163.65 112.48,163.57 v1(120.71,163.57) ; v1(101.43,126.21) U13.7 v1(92.9,126.21) ; U13.28 106.27,127 106.27,126.78 106.14,126.65 106.12,126.65 106.12,126.21 v1(103.77,126.21) ; 159.83,137.95 141.69,137.95 141.69,137.82 140.63,137.82 140.63,137.95 120.72,137.95 120.72,143.83 v1(115.23,143.83) ; v1(81.21,35.53) v1(81.21,46.77) 82.87,46.77 ; 191.52,97.47 192.09,97.47 R8.1 ; 191.52,97.47 189.55,95.51 ; 191.52,97.47 v1(191.52,102.88) ; v1(82.36,33.69) 82.36,34.26 83.84,34.26 83.84,34.39 97.16,34.39 98.11,35.34 98.68,35.34 98.68,35.21 99.5,35.21 99.5,34.7 100,34.7 100,35.21 100.86,35.21 100.86,35.34 107.04,35.34 v1(107.04,51.08) 108.02,51.08 ; 37.15,61.81 37.15,61.56 v1(47.12,61.56) 47.82,61.56 ; 193.04,103.19 195.77,103.19 195.77,104.78 U51.9 ; 107.25,57.74 v1(107.04,57.53) ; v1(79.44,69.47) 79.44,69.53 78.74,70.23 R13.1 ; v1(243.19,54.19) 242.89,54.19 242.89,40.42 234.4,40.42 234.4,40.29 233.34,40.29 233.34,40.42 207.58,40.42 204.79,43.21 v1(204.09,43.21) 199.34,43.21 199.34,43.08 198.29,43.08 198.29,43.21 183.37,43.21 182.01,41.85 167.71,41.85 167.71,54.64 159.07,54.64 159.07,70.13 151.45,70.13 151.45,95.91 ; 241.37,75.64 v1(245.6,75.64) 250,75.64 ; 107.25,69.66 v1(104.41,72.5) ; v1(186.31,127.83) v1(186.31,129.82) 184.87,129.82 184.87,129.7 183.81,129.7 183.81,129.82 v1(167.64,129.82) 159.83,129.82 ; v1(226.38,129.82) 239.33,129.82 ; 151.45,95.91 144.3,95.91 U54.3 ; 151.45,95.91 151.45,98.11 C8.1 ; 189.55,85.12 205.3,85.12 207.55,82.87 v1(210.02,82.87) 214.95,82.87 R23.1 ; v1(115.23,151.41) v1(89.85,151.41) 79.06,151.41 ; 249.24,161.52 v1(239.33,161.52) ; R17.1 217.11,92.65 v1(218.63,92.65) ; R25.1 78.99,56.13 v1(78.99,57.78) ; 93.54,94.69 v1(91.76,94.69) ; R19.1 v1(78.74,61.85) ; 100.9,154.22 110.05,154.22 ; R24.1 v1(167.64,138.05)
  BOTTOM w0.127: v1(47.12,61.56) 55.88,61.56 ; 55.88,61.56 v1(55.88,65.15) ; 55.88,61.56 55.88,44.1 v1(64.58,35.4) 64.72,35.53 v1(81.21,35.53) 81.21,33.69 v1(82.36,33.69) ; 81.35,102.98 83.47,102.98 v1(91.76,94.69) ; 81.35,102.98 v1(79.91,102.98) ; 81.35,102.98 v1(81.35,105.1) ; 71.8,126.47 89.85,126.47 ; 89.85,126.47 89.85,126.47 90.11,126.21 v1(92.9,126.21) ; 89.85,126.47 v1(89.85,151.41) ; 218.63,98.46 v1(218.63,92.65) ; 218.63,98.46 218.79,98.61 v1(221.43,98.61) ; 218.63,98.46 218.34,98.74 218.34,99.38 211.38,99.38 211.38,98.74 v1(210.61,98.74) ; v1(204.09,43.21) 204.09,51.27 204.79,51.27 v1(204.79,59.27) 208.4,59.27 208.4,72 v1(210.02,73.61) v1(210.02,82.87) ; 102.55,126.21 v1(103.77,126.21) 103.77,128.96 v1(102.85,129.87) ; 102.55,126.21 v1(102.55,123.13) 102.55,118.71 104.39,116.87 v1(104.39,115.74) 106.14,115.74 109.3,112.59 v1(116.65,112.59) ; 102.55,126.21 v1(101.43,126.21) ; v1(226.38,129.82) v1(199.71,129.82) v1(186.31,129.82) ; v1(245.6,75.64) 245.6,54.19 v1(243.19,54.19) ; v1(77.31,74.55) 77.31,71.6 v1(79.44,69.47) 79.44,65.6 78.74,65.6 v1(78.74,61.85) 78.74,58.04 v1(78.99,57.78) 78.99,48.99 v1(81.21,46.77) ; v1(91.76,94.69) v1(91.76,84.67) 92.46,83.98 92.46,83.28 92.9,83.28 v1(93.6,82.58) 99.19,82.58 v1(101.67,80.1) ; v1(91.76,94.69) 99.62,102.55 v1(99.62,106.87) ; v1(186.31,102.88) v1(191.52,102.88) ; v1(123.51,163.57) 123.51,162.05 v1(125,162.05)
  BOTTOM w0.381: v1(239.33,161.52) v1(239.33,144.12) ; v1(186.31,127.83) v1(186.31,102.88) ; v1(68.39,134.69) 71.8,131.28 v1(71.8,124.02) ; v1(230.19,176.92) 207.25,176.92 207.25,176.42 v1(206.17,176.42) ; v1(115.23,143.83) v1(115.23,151.41) ; v1(107.04,51.08) v1(107.04,57.53) ; J6.2 v1(74.93,183.83) ; v1(104.41,72.5) 101.67,72.5 v1(101.67,80.1) ; v1(120.71,163.57) v1(123.51,163.57) ; v1(167.64,138.05) v1(167.64,129.82)
CD2: length 141.5
  TOP w0.127: v1(142.66,187.47) v1(117.03,187.47) ; U13.38 v1(102.39,136.03)
  BOTTOM w0.127: v1(102.39,136.03) 102.39,198.3 116.96,198.3 116.96,187.54 v1(117.03,187.47) ; J10.5 146.05,190.85 v1(142.66,187.47)
CD3: length 186.8
  TOP w0.127: U13.33 146.56,130.99 146.56,128.16 146.94,128.16 146.94,127.78 147.32,127.78 147.32,127.4 147.7,127.4 147.7,127.01 148.08,127.01 148.08,126.63 148.46,126.63 148.46,126.25 148.84,126.25 148.84,125.87 225.3,125.87 v1(225.3,111.82)
  BOTTOM w0.127: J11.5 272.99,111.82 v1(225.3,111.82)
CD4: length 146.7
  TOP w0.127: U13.32 123.69,130.2 v1(125.98,127.9)
  BOTTOM w0.127: J12.5 134.68,6.29 134.68,119.2 v1(125.98,127.9)
ICSPCLK: length 88.7
  TOP w0.127: v1(83.82,191.47) R1.1 ; U13.16 100.81,122.95 v1(100.04,123.72)
  BOTTOM w0.127: v1(100.04,123.72) 99.59,123.72 99.59,124.04 99.34,124.29 99.08,124.29 99.08,123.73 97.57,123.73 97.18,124.12 97.18,159.53 83.82,172.89 v1(83.82,191.47)
ICSPDAT: length 100.2
  TOP w0.127: U13.17 101.6,124.68 v1(98.13,124.68) ; R2.1 v1(78.74,181.79)
  BOTTOM w0.127: v1(98.13,124.68) 100.51,124.68 100.99,124.21 100.99,123.13 100.63,122.77 97.46,122.77 96.41,123.83 96.41,149.05 82.67,162.79 82.67,177.85 v1(78.74,181.79)
MCLR/VPP: length 20.4
  TOP w0.127: R7.1 69.53,194.63 v1(72.39,194.63)
  BOTTOM w0.127: J6.1 v1(72.39,194.63)
SCK: length 384.9
  TOP w0.127: v1(50.8,66.93) R6.2 ; R5.2 139.7,148.15 ; 139.7,148.15 v1(142.81,148.15) ; 139.7,148.15 v1(127.52,148.15) ; v1(71.24,146.77) v1(111.67,146.77) ; U52.12 v1(150.64,151.76) ; R4.2 v1(187.96,99.95) ; U51.12 194.5,100.97 194.5,98.93 v1(193.1,98.93) ; v1(111.67,139.13) 111.67,131.65 103.2,131.65 U13.37 ; 61.34,70.48 v1(63.23,70.48)
  BOTTOM w0.127: 150.64,148.15 155.18,143.6 155.18,100.21 155.44,99.95 v1(187.96,99.95) 192.09,99.95 v1(193.1,98.93) ; 150.64,148.15 v1(150.64,151.76) ; 150.64,148.15 v1(142.81,148.15) ; v1(50.8,66.93) 59.67,66.93 v1(63.23,70.48) 62.75,70.97 62.75,146.77 ; 111.67,142.87 122.25,142.87 v1(127.52,148.15) ; 111.67,142.87 v1(111.67,146.77) ; 111.67,142.87 v1(111.67,139.13) ; 62.75,146.77 v1(71.24,146.77) ; 62.75,146.77 16.88,192.64 11.83,192.64 U57.14
SCK1: length 648
  TOP w0.127: J9.1 5.08,203.01 135.89,203.01 ; J10.1 135.89,203.01 ; 135.89,203.01 v1(139.64,203.01)
  BOTTOM w0.127: J11.1 273.24,99.25 273.24,28.62 249.7,5.08 J12.1 145.41,5.71 145.41,110.66 139.64,110.66 v1(139.64,203.01)
SDA: length 390.8
  TOP w0.127: 144.78,143.07 v1(150.4,143.07) ; 144.78,143.07 R9.2 ; 144.78,143.07 141.77,140.05 122.16,140.05 122.16,144.51 121.89,144.78 99.21,144.78 U13.42 99.21,131.65 99.08,131.65 v1(99.08,130.69) ; v1(64.88,69.22) 60.13,69.22 60.13,61.91 57.59,61.91 R10.2 ; U51.13 v1(195.77,99.69) 195.77,94.93 194.75,94.93 R8.2 ; 152.78,150.5 151.59,150.5 v1(151.59,145) ; v1(195.77,124.36) v1(150.65,124.36)
  BOTTOM w0.127: v1(195.77,99.69) v1(195.77,124.36) ; 63,123.06 61.29,123.06 60.72,123.63 60.72,141.21 U57.13 ; 63,123.06 63,75.46 64.88,73.58 v1(64.88,69.22) ; 63,123.06 74.38,123.06 77,125.68 89.75,125.68 89.75,125.26 95.38,125.26 95.38,129.77 96.3,130.69 v1(99.08,130.69) ; v1(151.59,145) 150.4,145 v1(150.4,143.07) 150.65,142.81 v1(150.65,124.36)
SDI1: length 534.3
  TOP w0.127: v1(254.68,32.8) v1(144.46,32.8) ; v1(37.97,108.65) 37.97,107.95 78.47,107.95 v1(79.01,108.49) ; v1(101.53,106.87) 135.51,106.87 135.51,107.38 v1(138.11,107.38)
  BOTTOM w0.127: v1(79.01,108.49) 85.98,108.49 87.59,106.87 97.37,106.87 98.57,108.08 100.32,108.08 v1(101.53,106.87) ; J12.2 143.51,32.8 ; 143.51,32.8 143.51,101.98 v1(138.11,107.38) 138.43,107.7 J10.2 ; 143.51,32.8 v1(144.46,32.8) ; J9.2 37.02,107.95 37.02,108.65 v1(37.97,108.65) ; J11.2 254.68,83.23 v1(254.68,32.8)
SDO1: length 487
  TOP w0.127: v1(137.37,112.21) v1(140.97,112.21) 162.43,112.21 162.43,105.52 201.07,105.52 201.5,105.09 206.45,105.09 206.45,105.52 223.29,105.52 v1(224.26,106.49) ; v1(96.96,104.33) v1(137.1,104.33) ; v1(77.58,106.5) 77.58,105.92 v1(38.36,105.92)
  BOTTOM w0.127: J11.3 273.24,106.49 v1(224.26,106.49) ; v1(77.58,106.5) 94.8,106.5 v1(96.96,104.33) ; J9.3 6.19,106.52 37.76,106.52 v1(38.36,105.92) ; v1(140.97,112.21) 141.22,112.46 141.22,210.57 J10.3 ; J12.3 140.97,75.73 137.1,79.61 v1(137.1,104.33) 137.1,111.94 v1(137.37,112.21)
SS1: length 123.4
  TOP w0.127: v1(57.82,131.45) 97.61,131.45 U13.44
  BOTTOM w0.127: J9.4 6.16,103.95 18.64,103.95 20.96,106.27 37.02,106.27 37.02,104.71 57.82,104.71 v1(57.82,131.45)
SS2: length 122.1
  TOP w0.127: U13.43 98.4,145.73 v1(113.83,145.73) ; J10.4 143.51,197.1 v1(115.94,197.1)
  BOTTOM w0.127: v1(115.94,197.1) 113.83,194.98 v1(113.83,145.73)
SS3: length 206.7
  TOP w0.127: v1(147.07,124.36) v1(132.65,124.36) ; v1(101.2,128.85) 100.21,128.85 100.21,131.65 100,131.65 U13.41
  BOTTOM w0.127: v1(101.2,128.85) 101.2,129.91 101.44,129.91 102.36,130.83 103.36,130.83 104.25,129.94 127.07,129.94 v1(132.65,124.36) ; J11.4 227.03,107.95 224.13,110.84 224.13,112.29 225.58,113.73 228.72,113.73 229.36,114.37 229.36,115.34 228.4,116.3 209.78,116.3 197.29,128.78 154.42,128.78 151.61,125.97 151.61,123.86 150.9,123.15 148.27,123.15 v1(147.07,124.36)
SS4: length 164.3
  TOP w0.127: v1(100.81,130.89) U13.40
  BOTTOM w0.127: J12.4 135.19,8.32 135.19,131.65 101.57,131.65 v1(100.81,130.89)
N40578: length 54
  TOP w0.127: v1(82.39,75.56) U53.21 ; U6.2 83.1,108.57 v1(83.1,107.45)
  BOTTOM w0.127: v1(82.39,75.56) 82.39,90.11 76.37,96.13 76.37,107.45 v1(83.1,107.45)
N40604: length 37.1
  TOP w0.127: U12.2 103.57,76.83 U53.22
N40612: length 64.4
  TOP w0.127: U53.23 v1(81.18,78.11) ; U19.2 v1(109.92,58.48)
  BOTTOM w0.127: v1(81.18,78.11) 81.18,60.94 83.63,58.48 v1(109.92,58.48)
N40620: length 63.8
  TOP w0.127: U25.2 84.26,32.29 69.29,32.29 69.29,79.38 U53.24
N40628: length 52.8
  TOP w0.127: 70.74,80.64 72.18,80.64 72.18,78.85 69.55,78.85 69.55,50.56 84.77,50.56 U31.2
N40636: length 56.8
  TOP w0.127: U37.2 49.72,82.41 67.98,82.41 67.98,81.92 U53.26
N40644: length 35.2
  TOP w0.127: U53.27 64.31,83.19 64.31,83.85 36.91,83.85 36.91,84.19 U43.2
N40652: length 73.1
  TOP w0.127: U50.2 37.02,92.06 66.09,92.06 66.09,84.45 U53.28
N41000: length 21.5
  TOP w0.127: U53.16 70.74,68.98 71.58,68.98 72.44,68.12 72.44,61.85 73.14,61.15 78.04,61.15 78.04,60.9 R19.2 79.82,59.12 83.12,59.12 R22.1
N41020: length 23.8
  TOP w0.127: 70.74,67.94 70.74,67.65 72.18,66.2 72.18,60.09 78.74,53.53 ; 78.74,53.53 R25.2 ; 78.74,53.53 83.63,53.53 R28.1
N41032: length 15.8
  TOP w0.127: U53.17 71.93,70.48 71.93,70.1 72.32,69.71 78.04,69.71 78.04,68.52 R13.2 80.52,66.04 R16.1
N41302: length 30.6
  TOP w0.127: U51.7 v1(201.85,107.31) ; U7.2 207.2,86.58 v1(201.85,86.58)
  BOTTOM w0.127: v1(201.85,86.58) v1(201.85,107.31)
N41314: length 56.5
  TOP w0.127: U14.2 v1(206.69,61.35) ; 198.5,108.58 v1(203.87,108.58)
  BOTTOM w0.127: v1(206.69,61.35) 206.69,108.58 v1(203.87,108.58)
N41326: length 76.9
  TOP w0.127: U20.2 v1(160.97,109.86) ; U51.5 v1(163.97,109.86)
  BOTTOM w0.127: v1(160.97,109.86) v1(163.97,109.86)
N41338: length 85.5
  TOP w0.127: U26.2 183.32,41.6 v1(194.36,41.6) ; U51.4 v1(194.36,111.12)
  BOTTOM w0.127: v1(194.36,41.6) v1(194.36,111.12)
N41350: length 107
  TOP w0.127: U51.3 v1(202.8,112.39) ; v1(214.48,41.88) 233.87,41.88 U32.2
  BOTTOM w0.127: v1(202.8,112.39) 202.8,41.88 v1(214.48,41.88)
N41362: length 91.8
  TOP w0.127: U51.2 v1(205.53,113.67) ; U38.2 251.9,75.64 251.76,75.64 v1(251.76,104.79)
  BOTTOM w0.127: v1(251.76,104.79) 223.31,104.79 223.31,113.67 v1(205.53,113.67)
N41374: length 31.5
  TOP w0.127: v1(228.41,114.94) 228.28,115.06 U45.2 ; U51.1 v1(204.36,114.94)
  BOTTOM w0.127: v1(204.36,114.94) v1(228.41,114.94)
N41442: length 36
  TOP w0.127: U2.2 191.45,88.41 v1(203.76,88.41) ; U51.21 v1(203.76,106.05)
  BOTTOM w0.127: v1(203.76,106.05) v1(203.76,88.41)
N41446: length 42.7
  TOP w0.127: U51.22 v1(209.79,107.31) ; U8.2 v1(217.36,71.78)
  BOTTOM w0.127: v1(209.79,107.31) 209.41,106.93 209.41,95.83 216.73,88.51 216.73,77.79 217.36,77.79 v1(217.36,71.78)
N41450: length 69.8
  TOP w0.127: v1(205.04,107.42) 206.21,108.58 207.9,108.58 ; U15.2 198.82,55.13 v1(205.04,61.35)
  BOTTOM w0.127: v1(205.04,107.42) v1(205.04,61.35)
N41454: length 93.2
  TOP w0.127: U21.2 169.61,73.1 v1(200.9,73.1) ; U51.24 v1(200.9,109.86)
  BOTTOM w0.127: v1(200.9,73.1) v1(200.9,109.86)
N41458: length 83.6
  TOP w0.127: U27.2 v1(216.6,34.18) ; U51.25 v1(209.79,111.12)
  BOTTOM w0.127: v1(209.79,111.12) 208.64,109.98 208.64,92.8 215.43,86.01 215.43,35.34 v1(216.6,34.18)
N41462: length 79
  TOP w0.127: U33.2 244.79,55.89 v1(244.39,56.29) ; U51.26 v1(219.14,112.39)
  BOTTOM w0.127: v1(219.14,112.39) 219.14,103.36 244.39,78.11 v1(244.39,56.29)
N41466: length 48.9
  TOP w0.127: U51.27 220.28,113.67 v1(221.23,112.71) ; U39.2 243.27,96.85 v1(228.41,96.85)
  BOTTOM w0.127: v1(228.41,96.85) 221.23,104.03 v1(221.23,112.71)
N41734: length 56.9
  TOP w0.127: v1(222.05,117.25) 219.73,114.94 U51.28 ; U46.2 v1(241.23,117.25)
  BOTTOM w0.127: v1(241.23,117.25) v1(222.05,117.25)
N42242: length 24.2
  TOP w0.127: R20.1 217.68,86.36 R17.2 213.91,90.12 213.91,99.69 U51.16
N42246: length 32.1
  TOP w0.127: 207.9,98.42 209.09,98.42 209.09,98.43 v1(212.33,98.43) ; R26.1 v1(217.68,78.74) R23.2
  BOTTOM w0.127: v1(212.33,98.43) 217.68,93.07 v1(217.68,78.74)
N42268: length 19
  TOP w0.127: U51.17 214.21,100.97 214.21,95.76 R11.2 217.68,93.98 R14.1
N42276: length 25.6
  TOP w0.127: 167.64,135.45 163.88,135.45 163.88,149.22 U52.15 ; 167.64,135.45 R24.2 ; 167.64,135.45 167.64,135.44 168.46,134.62 R27.1
N42308: length 19.3
  TOP w0.127: 167.64,143.07 164.39,143.07 164.39,150.5 162.18,150.5 ; 167.64,143.07 R18.2 ; 167.64,143.07 168.47,142.24 R21.1
N42508: length 15.7
  TOP w0.127: v1(67.5,193.93) 67.5,191.33 68.58,191.33 ; 68.58,191.33 R3.2 ; 68.58,191.33 R7.2
  BOTTOM w0.127: J7.2 67.5,198.31 v1(67.5,193.93)
N42712: length 105.7
  TOP w0.127: U52.8 156.26,156.84 156.26,156.35 251.14,156.35 U3.2
N42740: length 66.6
  TOP w0.127: 152.78,158.12 158.8,158.12 158.8,157.62 208.21,157.62 U9.2
N42752: length 42.4
  TOP w0.127: U16.2 165.54,162.67 160.73,162.67 160.73,161.4 163.62,161.4 163.62,160.16 158.1,160.16 158.1,159.38 U52.6
N42772: length 42.1
  TOP w0.127: U52.5 152.78,161.15 v1(133.87,161.15) ; U22.2 v1(125.41,170.5)
  BOTTOM w0.127: v1(133.87,161.15) 133.87,170.5 v1(125.41,170.5)
N42784: length 64.4
  TOP w0.127: U52.4 157.57,161.93 v1(157.95,161.54) ; U28.2 201.61,144.47 v1(177.93,144.47)
  BOTTOM w0.127: v1(177.93,144.47) 162.22,144.47 157.95,148.74 v1(157.95,161.54)
N42796: length 38.5
  TOP w0.127: U34.2 v1(161.73,131.48) ; U52.3 155.63,163.19 v1(155.8,163.37)
  BOTTOM w0.127: v1(161.73,131.48) 155.8,137.41 v1(155.8,163.37)
N42808: length 50.1
  TOP w0.127: v1(131,164.47) U52.2 ; U40.2 122.62,145.24 v1(130.74,145.24)
  BOTTOM w0.127: v1(130.74,145.24) 131,145.49 v1(131,164.47)
N42820: length 86.1
  TOP w0.127: v1(80.96,166.34) v1(117.07,166.34) ; 152.78,165.74 v1(127.54,165.74) ; U47.2 v1(80.96,153.3)
  BOTTOM w0.127: v1(80.96,153.3) v1(80.96,166.34) ; v1(127.54,165.74) 117.67,165.74 v1(117.07,166.34)
N42884: length 95
  TOP w0.127: U4.2 232.09,156.84 U52.21
N42896: length 41.5
  TOP w0.127: 162.18,158.12 186.12,158.12 U10.2
N42900: length 43.4
  TOP w0.127: v1(160.29,159.21) 160.46,159.38 U52.23 ; U17.2 144.71,184.43 160.05,184.43 v1(160.29,184.67)
  BOTTOM w0.127: v1(160.29,184.67) v1(160.29,159.21)
N42904: length 56.7
  TOP w0.127: U52.24 162.18,160.46 v1(157.14,160.46) ; U23.2 111.95,161.15 v1(117.32,161.15)
  BOTTOM w0.127: v1(157.14,160.46) 134.93,160.46 134.66,160.19 132.51,160.19 131.79,160.91 131.79,162.75 131.17,163.37 128.63,163.37 125.46,160.19 118.27,160.19 v1(117.32,161.15)
N42908: length 53.9
  TOP w0.127: U29.2 v1(184.34,131.2) ; U52.25 v1(184.34,161.93)
  BOTTOM w0.127: v1(184.34,131.2) v1(184.34,161.93)
N42912: length 45.9
  TOP w0.127: v1(159.12,163.19) 159.12,163.19 U52.26 ; U35.2 141.16,139.41 v1(159.12,139.41)
  BOTTOM w0.127: v1(159.12,139.41) v1(159.12,163.19)
N42916: length 69.8
  TOP w0.127: U41.2 102.8,153.71 v1(120.71,153.71) ; U52.27 156.86,164.47 156.86,162.42 v1(129.79,162.42)
  BOTTOM w0.127: v1(120.71,153.71) 127.61,153.71 129.79,155.89 v1(129.79,162.42)
N43192: length 137.6
  TOP w0.127: v1(154.67,165.74) 162.18,165.74 ; v1(110.5,148.2) 70.29,148.2 U48.2
  BOTTOM w0.127: v1(110.5,148.2) 110.5,138.18 135.44,138.18 135.44,159.96 152.61,159.96 152.61,163.67 v1(154.67,165.74)
N43224: length 25
  TOP w0.127: C9.1 v1(68.58,180.85)
  BOTTOM w0.127: v1(68.58,180.85) 69.66,181.93 69.66,200.85 J7.1
N43624: length 15.3
  TOP w0.127: R15.1 172.28,149.42 v1(167.64,149.42) R12.2 ; U52.17 v1(165.47,151.76)
  BOTTOM w0.127: v1(167.64,149.42) 165.47,149.42 v1(165.47,151.76)
N43852: length 63.5
  TOP w0.127: v1(59.2,120.72) 73.85,120.72 U5.2 ; 61.34,75.56 v1(59.2,75.56)
  BOTTOM w0.127: v1(59.2,75.56) v1(59.2,120.72)
N43864: length 54.7
  TOP w0.127: 61.34,76.83 68.17,76.83 v1(68.17,76.14) ; v1(73.14,81.14) 95.44,81.14 U11.2
  BOTTOM w0.127: v1(68.17,76.14) 67.06,76.14 67.06,80.33 67.87,81.14 v1(73.14,81.14)
N43876: length 56.2
  TOP w0.127: U18.2 109.15,74.55 v1(79.83,74.55) ; v1(68.34,78.11) 61.34,78.11
  BOTTOM w0.127: v1(79.83,74.55) 76.28,78.11 v1(68.34,78.11)
N43888: length 82.1
  TOP w0.127: v1(65.83,79.38) 61.34,79.38 ; U24.2 v1(100.01,39.13)
  BOTTOM w0.127: v1(100.01,39.13) 65.83,39.13 v1(65.83,79.38)
N43900: length 35.3
  TOP w0.127: v1(93.66,84.29) U30.2 ; 61.34,80.64 v1(63.95,80.64)
  BOTTOM w0.127: v1(63.95,80.64) 67.03,83.72 93.09,83.72 v1(93.66,84.29)
N43912: length 53
  TOP w0.127: U36.2 66.48,76.31 60.15,76.31 60.15,81.92 61.34,81.92
N43924: length 43
  TOP w0.127: U42.2 39.05,62.75 39.71,63.42 42.13,63.42 42.13,83.19 61.34,83.19
N43936: length 39.5
  TOP w0.127: v1(34.8,97.45) 35.97,97.45 35.5,97.93 35.5,102.99 U49.2 ; v1(57.99,84.8) 57.99,84.69 60.15,84.69 60.15,84.45 61.34,84.45
  BOTTOM w0.127: v1(57.99,84.8) 45.34,97.45 v1(34.8,97.45)
N104053: length 28.8
  TOP w0.127: C7.1 148.25,102.53 148.25,102.14 139.7,102.14 ; 139.7,102.14 135.71,102.14 133.9,100.33 BT1.1 ; 139.7,102.14 U54.1
N111887: length 7.4
  TOP w0.127: R2.2 v1(78.74,205.61)
  BOTTOM w0.127: J6.4 78.74,209.55 v1(78.74,205.61)
N111889: length 7.4
  TOP w0.127: R1.2 v1(83.82,205.61)
  BOTTOM w0.127: v1(83.82,205.61) 83.82,209.55 J6.5
N118143: length 11.7
  TOP w0.127: U13.27 112.7,126.21 112.7,127 J3.1
N118150: length 14.1
  TOP w0.127: U13.26 119.05,125.4 J3.2
N118163: length 18.4
  TOP w0.127: U13.25 108.13,124.61 v1(120.82,124.61)
  BOTTOM w0.127: v1(120.82,124.61) 123.19,124.61 J3.3
N118167: length 9.8
  TOP w0.127: U13.22 105.59,114.55 104.2,114.55 104.2,113.09 J5.1
N118185: length 20.2
  TOP w0.127: v1(100.98,117.29) 102.63,117.29 103.2,117.85 U13.19
  BOTTOM w0.127: J5.4 102.63,106.92 102.63,117.29 v1(100.98,117.29)
N118192: length 21.7
  TOP w0.127: J2.4 82.55,130.2 U13.2
N118196: length 18.4
  TOP w0.127: U13.3 85.09,129.39 J2.3
N118203: length 15.1
  TOP w0.127: U13.4 87.63,128.6 J2.2
N118215: length 11.7
  TOP w0.127: J2.1 90.17,127.79 U13.5
N118227: length 13.6
  TOP w0.127: J4.3 93.98,124.61 U13.9
N118234: length 14.7
  TOP w0.127: U13.10 95.06,123.8 v1(95.06,117.15)
  BOTTOM w0.127: v1(95.06,117.15) 95.06,111.57 J4.2
N118238: length 17.2
  TOP w0.127: v1(96.95,119.77) 96.95,123.01 U13.11
  BOTTOM w0.127: v1(96.95,119.77) 96.95,110.92 J4.1
N118679: length 13.1
  TOP w0.127: v1(103.99,134.86) U13.36
  BOTTOM w0.127: J1.1 103.99,138.28 v1(103.99,134.86)
N118686: length 10.3
  TOP w0.127: v1(105.01,136.44) 105.01,133.53 104.8,133.53 U13.35
  BOTTOM w0.127: v1(105.01,136.44) 105.01,136.76 J1.2
N118690: length 9
  TOP w0.127: v1(105.59,134.86) U13.34
  BOTTOM w0.127: J1.3 109.22,135.75 108.33,134.86 v1(105.59,134.86)
N128561: length 12
  TOP w0.127: v1(104.64,119.23) 104.8,119.23 U13.21
  BOTTOM w0.127: J5.2 105.35,111.7 105.35,118.68 104.8,119.23 v1(104.64,119.23)

## Copper pours and planes (outline as drawn; the poured copper is in the pictures)
5 V on TOP: 278.13,215.9 278.13,0.64 0,0.64 0,215.9
